# EAGLE board USB_DLT (EAGLE 9.4.2)
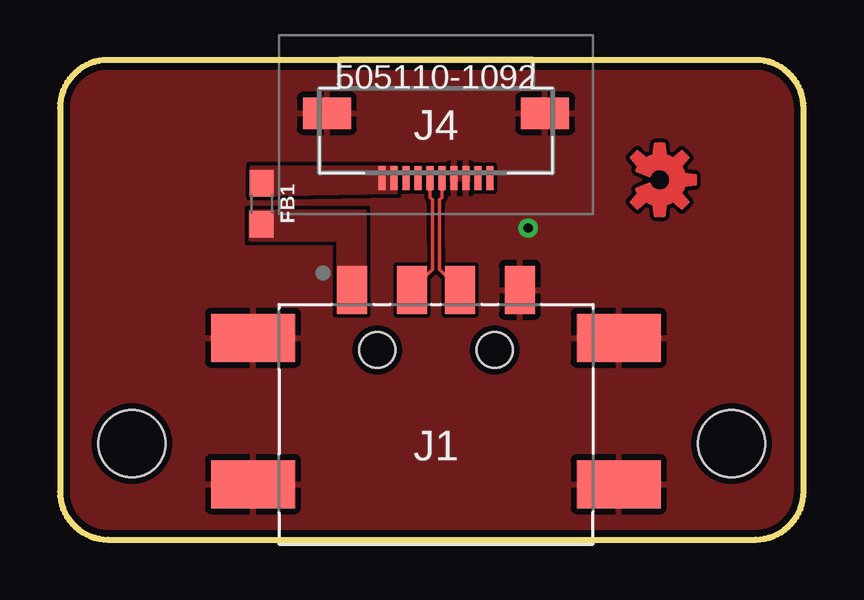
[diagram p0: board, top side]
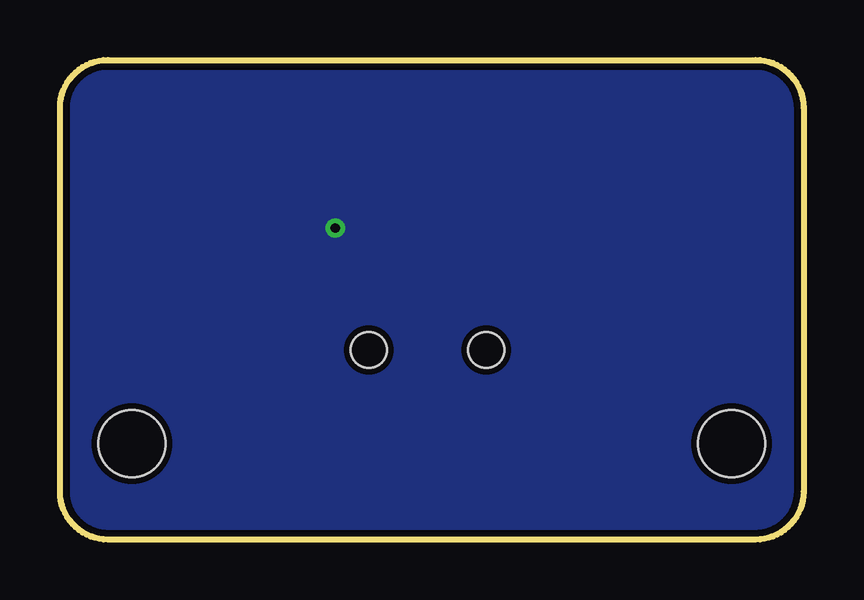
[diagram p1: board, bottom side, seen from below]

Size 31 x 20 mm. Coordinates in mm from the lower left corner, seen from the top.
Outline: 29,0 arc90 31,2 31,18 arc90 29,20 2,20 arc90 0,18 0,2 arc90 2,0 29,0
Copper layers (1*16): Top 0.035mm / dielectric 1.5mm / Bottom 0.035mm
Design rules "adafruit-modified-for-pcb-ng *": minimum track width 6mil, minimum drill 15.5mil, track to track 6mil, track to pad 6mil, pad to pad 6mil, via to via 6mil, smd to smd 0mil, copper to edge 11mil, drill to drill 8mil, minimum pad ring 10mil, minimum via ring 8mil, stop-mask expansion 0.116840625mm, vias tented up to drill 20mil, thermal gap 10mil
Holes 2.8 mm at 3,4 28,4

## Footprints (pad centres in the part's own frame; a part is rotated, then mirrored left to right if it is on the bottom)
0603 = smd 1.1 x 1: 1 -0.85,0; 2 0.85,0
629104190121 = smd 1.25 x 2: 1 -3.5,2; 2 -1,2; 3 1,2; 4 3.5,2 | smd 3.5 x 2: SHELL -7.625,0; SHELL1 7.625,0; SHELL2 -7.625,-6.1; SHELL3 7.625,-6.1 | hole 1.5: -2.45,-0.5; 2.45,-0.5
5051101092 = smd 0.3 x 1: 1 -2.25,2.475; 2 -1.75,2.475; 3 -1.25,2.475; 4 -0.75,2.475; 5 -0.25,2.475; 6 0.25,2.475; 7 0.75,2.475; 8 1.25,2.475; 9 1.75,2.475; 10 2.25,2.475 | smd 2 x 1.3: 11 -4.55,-0.225; 12 4.55,-0.225

## Placement (x,y rotation side)
FB1  .25/3A  [0603]  8.41,14 270 top
J1  [629104190121]  15.68,8.41 0 top
J4  505110-1092  [5051101092]  15.68,17.55 180 top
LOGO1  OSHW-LOGOS-COPPER  [OSHW-LOGO-S_COPPER]  25,15 270 top

## Library data of the parts
FB1 = SparkFun-Coils; PROD_ID: NDUC-13805
J1 = EAGLE-INPUT_OUTPUT_CONNECTORS-rev17a
J4 = SamacSys_Parts; DESCRIPTION: Molex Easy-On Series 0.5mm Pitch 10 Way Right Angle SMT Male FPC Connector, ZIF Bottom Contact; HEIGHT: 0mm; MANUFACTURER_NAME: Molex; MANUFACTURER_PART_NUMBER: 505110-1092; MOUSER_PART_NUMBER: 538-505110-1092; MOUSER_PRICE-STOCK: https://www.mouser.com/Search/Refine.aspx?Keyword=538-505110-1092
LOGO1 = SparkFun-Aesthetics

## Nets
5V: FB1.1 J4.9 J4.10
5V_FB: FB1.2 J1.1
GND: J1.4 J1.SHELL J1.SHELL1 J1.SHELL2 J1.SHELL3 J4.3 J4.4 J4.11 J4.12
USB1_OTG_ID: J4.7
USB_D_N: J1.2 J4.6
USB_D_P: J1.3 J4.5

## Tracks (layer width: path | path; a pad name or v marks a point on that pad's centre or on a via)
5V
  pour Top (no thermals): 14.01,14.46 7.99,14.36 7.99,14.46 7.99,15.53 14.01,15.53
5V_FB
  pour Top (no thermals): 7.94,13.7 12.71,13.7 12.71,9.48 11.59,9.48 11.59,12.48 7.94,12.48
GND  (via drill 0.39)
  other vias: 19.52,12.99
  pour Top (rank 2): 31.81,-1.64 -1.61,-1.64 -1.61,21.57 31.81,21.57
  pour Bottom (rank 2): 32.12,-1.84 32.12,22.08 -1.92,22.08 -1.92,-1.84
USB_D_N
  Top 0.152: J4.6 15.43,14.27 15.53,14.17 15.53,13.77 | J1.2 15.52,11.26 15.52,12.42 15.53,12.43 15.53,13.77 | 15.53,13.77
USB_D_P
  Top 0.152: J4.5 15.93,14.27 15.83,14.17 | 15.83,14.17 15.83,13.9 | J1.3 15.83,11.26 15.83,12.12 15.83,14.17 | 15.83,14.17

## Text on the board
tStop: USB-2.0